# Altium PCB Relay Module PCB.PcbDoc
Units mm, origin at the board's own origin, x right, y up, seen from the top; angles counter-clockwise.
Board outline 140 x 70 mm, 2 copper layers (Top Layer, Bottom Layer); 36 components, 25 nets, 119 pads, 0 vias.
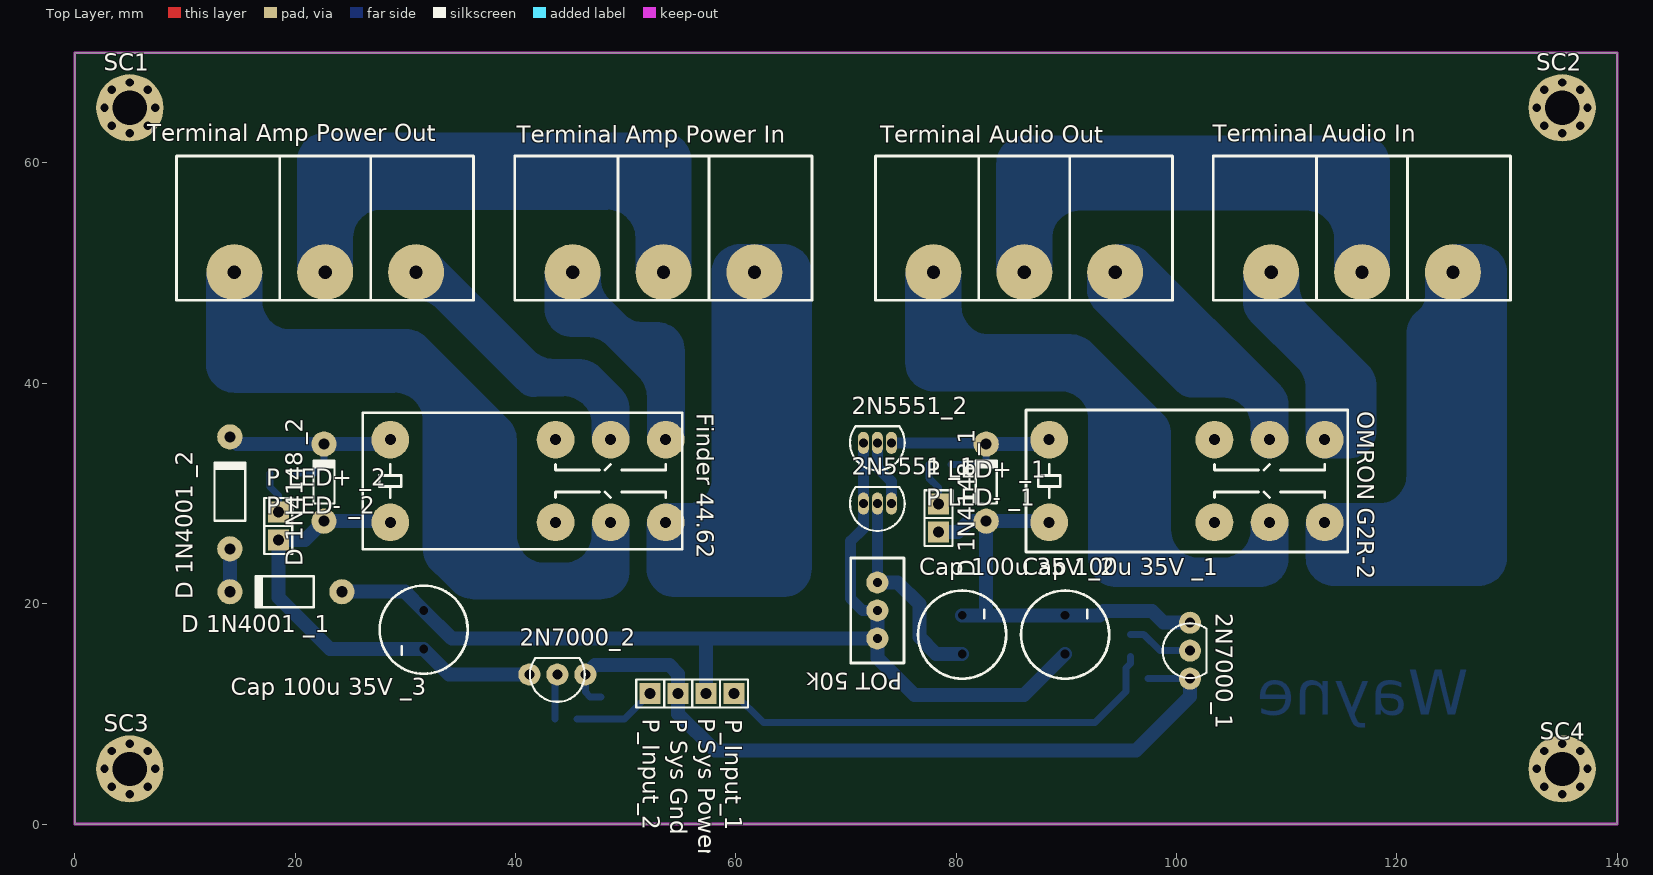
[diagram p0: Top Layer view]
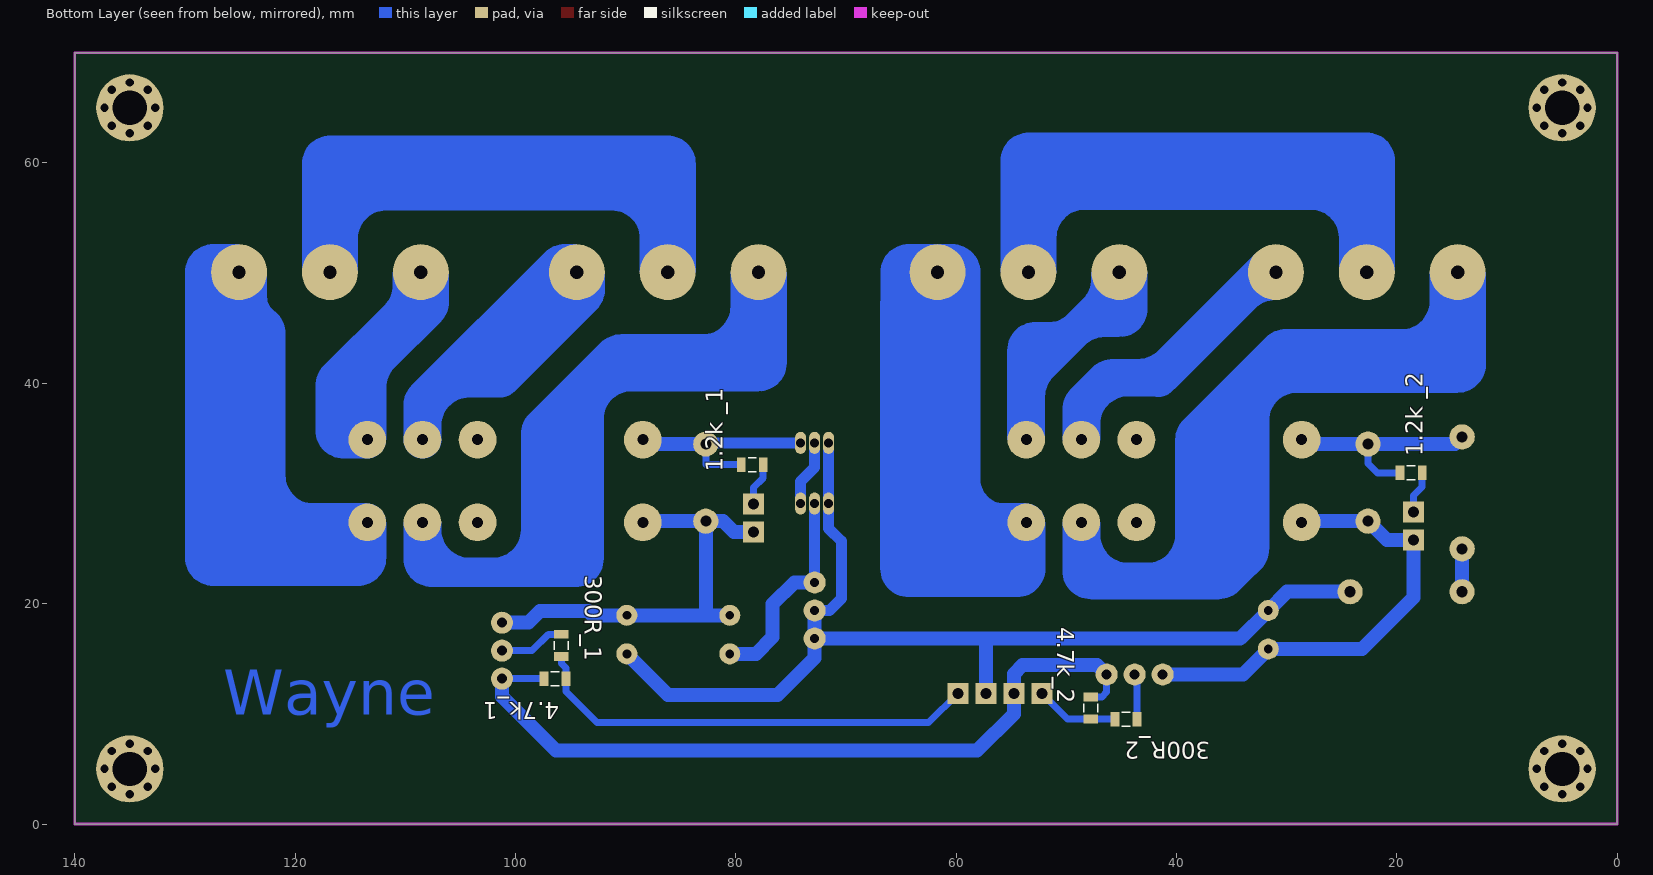
[diagram p1: Bottom Layer view, seen from below]

## Layer stack, top to bottom
Top Layer: signal copper 0.0356
Dielectric: dielectric 0.32, FR-4, Dk 4.8
Bottom Layer: signal copper 0.0356

## Board outline
0,0 0,70 140,70 140,0

## Design rules (kind name [scope] priority, off if disabled: settings)
Clearance polygon [InPolygon] p1: gap=2.54
Clearance [All] p2: gap=0.254
ComponentClearance [All] p1: gap=0 collisioncheckmode=3 verticalgap=0 showdistances=FALSE
HoleSize [All] p1: absolutevalues=TRUE maxlimit=5 minlimit=0.305 maxpercent=80.000 minpercent=20.000
PolygonConnect [All] p1: connectstyle=Relief reliefconductorwidth=0.254 reliefentries=4 polygonreliefangle="90 Angle" airgapwidth=0.254
RoutingVias [All] p1: holewidth=0.305 width=1.27 viastyle="Through Hole" minholewidth=0.305 minwidth=1.27 maxholewidth=2 maxwidth=1.27
ShortCircuit [All] p1: allowed=TRUE
SilkToSilkClearance [All] p1: silktosilkclearance=0
SilkToSolderMaskClearance [IsPad] p1: minsilkscreentomaskgap=0 clearancetoexposedcopper=TRUE
SolderMaskExpansion [All] p1: expansion=0.102
Width [All] p1: maxlimit=5.08 minlimit=0.635 preferedwidth=1.27
23 further rules are at their usual default settings.

## Components (designator, comment, footprint, x,y, rotation, side; value= is the part's Value field where it differs from the comment)
"1.2k _1" "Resistor SMD 0805" RES_0805 78.511,32.611 r0 bottom
"1.2k _2" "Resistor SMD 0805" RES_0805 18.708,31.875 r0 bottom
"2N5551 _1" "2N5551" 2N5551 72.847,29.081 r90 top
2N5551_2 "2N5551" 2N5551 72.847,34.593 r90 top
2N7000_1 "2N7000" 2N7000 101.224,15.732 r0 top
2N7000_2 "2N7000" 2N7000 43.802,13.57 r90 top
4.7k_1 "Resistor SMD 0805" RES_0805 96.423,13.192 r180 bottom
4.7k_2 "Resistor SMD 0805" RES_0805 47.782,10.525 r270 bottom
300R_1 "Resistor SMD 0805" RES_0805 95.839,16.215 r90 bottom
300R_2 "Resistor SMD 0805" RES_0805 44.582,9.509 r180 bottom
"Cap 100u 35V _1" "Cap" "RADIAL CAPACITOR 3.5MM PITCH" 89.891,15.441 r90 top
"Cap 100u 35V _2" "Cap" "RADIAL CAPACITOR 3.5MM PITCH" 80.543,15.441 r90 top
"Cap 100u 35V _3" "Cap" "RADIAL CAPACITOR 3.5MM PITCH" 31.675,19.381 r270 top
"D 1N4001 _1" "Diode 1N4001" DO-41 14.085,21.08 r0 top
"D 1N4001 _2" "Diode 1N4001" DO-41 14.076,35.138 r270 top
"D 1N4148 _1" "Diode 1N4148" DO-35 82.728,27.48 r90 top
"D 1N4148 _2" "Diode 1N4148" DO-35 22.619,27.481 r90 top
"Finder 44.62" "Finder 44.62" "FINDER 44.62" 28.639,27.379 r0 top
"OMRON G2R-2" "OMRON G2R-2" "OMRON G2R-2 - BROWN" 88.443,27.379 r0 top
"P LED+ _1" "Header 1 Pin" HDR1X1_180_2.54 78.384,29.03 r90 top
"P LED+ _2" "Header 1 Pin" HDR1X1_180_2.54 18.479,28.319 r90 top
"P LED- _1" "Header 1 Pin" HDR1X1_180_2.54 78.384,26.49 r90 top
"P LED- _2" "Header 1 Pin" HDR1X1_180_2.54 18.479,25.779 r90 top
"P Sys Gnd" "Header 1 Pin" HDR1X1_180_2.54 54.767,11.846 r180 top
"P Sys Power" "Header 1 Pin" HDR1X1_180_2.54 57.307,11.846 r180 top
P_Input_1 "Header 1 Pin" HDR1X1_180_2.54 59.847,11.846 r180 top
P_Input_2 "Header 1 Pin" HDR1X1_180_2.54 52.227,11.846 r180 top
"POT 50k" "BOURNS 3296" "POTENTIOMETER 25 TURN" 72.847,19.378 r180 top
SC1 "M3" SCRREW_M3 5,65 r0 top
SC2 "M3" SCRREW_M3 135,65 r0 top
SC3 "M3" SCRREW_M3 5,5 r0 top
SC4 "M3" SCRREW_M3 135,5 r0 top
"Terminal Amp Power In" "3P Terminal Block" "3P TERMINAL BLOCK" 53.442,50.087 r180 top
"Terminal Amp Power Out" "3P Terminal Block" "3P TERMINAL BLOCK" 22.733,50.087 r180 top
"Terminal Audio In" "3P Terminal Block" "3P TERMINAL BLOCK" 116.84,50.087 r180 top
"Terminal Audio Out" "3P Terminal Block" "3P TERMINAL BLOCK" 86.182,50.087 r180 top

## Footprints (in the part's own frame and the unit in brackets; to place one, negate y for a bottom-side part, rotate by r counter-clockwise, add the part's x,y. Pads: shape width x height; smd on the part's side, far side on the other; paste and mask are expansions set on the pad)
2N5551 [mm] "TO, Flat Index; 3 In-Line, Axial Leads; Body Dia. 4.5mm; Leads 0.51 x 0.48 mm (max)"
  oval 2x1 hole 0.8: 1(0,-1.27) 2(0,0) 3(0,1.27)
  silkscreen extent -2.48,-2.48 1.5,2.48, body extent -2.41,-2.4 1.59,2.4, height 6.55
2N7000 [mm] "2N7000 TO-92"
  round 2 hole 0.9: 1(0,-2.54) 2(0,0) 3(0,2.54)
  silkscreen extent -2.48,-2.48 1.5,2.48, body extent -2.66,-2.89 1.53,2.85, height 10.33
"3P TERMINAL BLOCK" [mm] "Howder 3P Terminal Block HD-816-3P"
  round 5.08 hole 1.2: 0(-8.25,0) 1(0,0) 2(8.25,0)
  silkscreen extent -13.46,-10.54 13.5,2.56, body extent -13.5,-10.5 13.5,2.51, height 13
DO-35 [mil] "Diode, Axial; Body 3.8 x 1.9 mm (LxDia. max), Lead Dia. 0.53 mm (max)"
  round 90 hole 39.37: 1(0,0) 2(275.59,0)
  silkscreen extent 63,-37 220,37, body extent -10,-39 285,39, height 79
DO-41 [mil] "Diode, Axial; Body 5.2 x 2.7 mm (LxDia. max), Lead Dia. 0.86 mm (max)"
  round 90 hole 39.37: 1(400,0) 2(0,0)
  silkscreen extent 87,-55 300,55, body extent -17,-54 417,54, height 107
"FINDER 44.62" [mm] "Finder 44.62 PCB Relay"
  round 3.429 hole 1: C1(20,7.5) C2(20,0) Coil+(0,7.5) Coil-(0,0) NC1(15,7.5) NC2(15,0) NO1(25,7.5) NO2(25,0)
  silkscreen extent -2.5,-2.45 26.5,9.95, body extent -2.5,-2.4 26.5,10, height 25.03
HDR1X1_180_2.54 [mm] "Connector; Header; 2 Position"
  rect 1.905x1.905 hole 1: 1(0,0)
  silkscreen extent -1.27,-1.27 1.27,1.27, body extent -1.27,-1.27 1.27,1.27, height 7.58
"OMRON G2R-2 - BROWN" [mm] "OMRON G2R-2 Power Relay DPDT"
  round 3.429 hole 1: C1(20,7.5) C2(20,0) Coil+(0,7.5) Coil-(0,0) NC1(15,7.5) NC2(15,0) NO1(25,7.5) NO2(25,0)
  silkscreen extent -2.1,-2.7 27.1,10.2, body extent -2.1,-2.61 26.86,10.11, height 25.27
"POTENTIOMETER 25 TURN" [mm] "Bourns Potentiometer 3296"
  round 2 hole 0.8: 1(0,-2.54) 2(0,0) 3(0,2.54)
  silkscreen extent -2.41,-4.78 2.41,4.78, body extent -2.41,-4.77 2.42,4.77, height 11.55
"RADIAL CAPACITOR 3.5MM PITCH" [mm] "Radial Capacitor 3.5mm Pitch 8*11"
  round 0 / inner round 0 / far side round 1.905 hole 0.8: 0(0,0) 1(3.5,0)
  silkscreen extent -2.25,-4 5.75,4, body extent -2.25,-3.99 5.75,4.01, height 11.54
RES_0805 [mm] "Chip Resistor, Body 2.0x1.2mm, 0805, IPC Medium Density"
  round 0.254 on Mech14: 0(0,0)
  rect 0.8x1.3 smd: 1(-1,0) 2(1,0)
  Top Layer pour cut-out: -0.6,0.75 0.6,0.75 0.6,-0.75 -0.6,-0.75
  silkscreen extent -0.38,-0.64 0.38,0.64, body extent -1.1,-0.67 1.1,0.68, height 0.69
SCRREW_M3 [mil]
  round 50 hole 30: 0(-90.55,0) 0(-64.03,-64.03) 0(-64.03,64.03) 0(0,-90.55) 0(0,90.55) 0(64.03,-64.03) 0(64.03,64.03) 0(90.55,0)
  round 240.16 hole 122.05: 0(0,0)

## Part data
"2N5551 _1" 2N5551_2: "NPN 2N5551 General Purpose Amplifier"
2N7000_1 2N7000_2: "2N7000 TO-92"
"Cap 100u 35V _1" "Cap 100u 35V _2" "Cap 100u 35V _3": library part "Cap Radial 8*11 3.5mm Pitch", "Cap Radial 8*11 3.5mm Pitch"
"D 1N4001 _1" "D 1N4001 _2": "1 Amp General Purpose Rectifier"
"D 1N4148 _1" "D 1N4148 _2": "High Conductance Fast Diode"
"Finder 44.62": "Finder 44.62 PCB Relay"
"OMRON G2R-2": "OMRON G2R-2 Power Relay DPDT"
SC1 SC2 SC3 SC4: library part Screw_M3, "Screw"
"Terminal Amp Power In" "Terminal Amp Power Out" "Terminal Audio In" "Terminal Audio Out": "Howder 3P Terminal Block HD-816-3P"

## Nets (pads, with @x,y where several pads share a name; then routed paths per layer and width w, separated by ;. In a path a pad name is that pad's centre, name@x,y a point inside that pad or via, vN(x,y) a via of type N, cw(c..) or ccw(c..) an arc to the next point about the centre after c; other vN are vias at no path point)
AUDIO_GND: "Terminal Audio In.1" "Terminal Audio Out.1" | length 44.4
  Bottom Layer w3.429: 86.182,50.087 86.182,55.809 88.879,58.506 114.229,58.506 116.84,55.894 116.84,50.087
AUDIO_IN_L: "OMRON G2R-2.NO2" "Terminal Audio In.0" | length 34.4
  Bottom Layer w3.429: 113.443,27.379 125.09,27.379 125.09,50.087
AUDIO_IN_R: "OMRON G2R-2.NO1" "Terminal Audio In.2" | length 17.2
  Bottom Layer w3.429: 108.59,50.087 108.59,46.237 113.443,41.385 113.443,34.879
AUDIO_OUT_L: "OMRON G2R-2.C2" "Terminal Audio Out.2" | length 39.3
  Bottom Layer w3.429: 77.932,50.087 77.932,43.545 ccw(c80.472,43.545) 80.472,41.005 92.359,41.005 96.347,37.017 96.347,25.765
AUDIO_OUT_R: "OMRON G2R-2.C1" "Terminal Audio Out.0" | length 23.8
  Bottom Layer w3.429: 94.432,50.087 94.432,47.34 101.351,40.421 106.162,40.421 108.443,38.141 108.443,34.879
GND: 2N7000_1.1 2N7000_2.1 4.7k_1.1 4.7k_2.1 "P Sys Gnd.1" | length 71.3
  Bottom Layer w0.635: 2N7000_2.1 46.342,11.966 46.782,11.525 4.7k_2.1 ; 4.7k_1.1 2N7000_1.1
  Bottom Layer w1.27: 2N7000_2.1 47.199,14.427 53.964,14.427 54.767,13.624 54.767,11.846 54.767,9.992 58.104,6.655 96.312,6.655 101.224,11.567 2N7000_1.1
"Net1.2k _1_1": "1.2k _1.1" "P LED+ _1.1" | length 3.9
  Bottom Layer w0.635: 77.511,32.611 77.511,31.404 78.384,30.531 78.384,29.03
"Net1.2k _1_2": 2N5551_2.1 "1.2k _1.2" "D 1N4148 _1.2" "OMRON G2R-2.Coil+" | length 19.6
  Bottom Layer w0.635: 79.511,32.611 82.728,32.611 82.728,34.48
  Bottom Layer w1: 2N5551_2.1 82.615,34.593 82.728,34.48
  Bottom Layer w1.27: 82.728,34.48 88.044,34.48 88.443,34.879
"Net1.2k _2_1": "1.2k _2.1" "P LED+ _2.1" | length 3.9
  Bottom Layer w0.635: 17.708,31.875 17.708,30.578 18.479,29.806 18.479,28.319
"Net1.2k _2_2": "1.2k _2.2" "D 1N4001 _2.2" "D 1N4148 _2.2" "Finder 44.62.Coil+" | length 20
  Bottom Layer w0.635: 19.708,31.875 21.761,31.875 22.619,32.733 22.619,34.481
  Bottom Layer w1.27: 14.076,35.138 14.734,34.481 22.619,34.481 28.241,34.481 28.639,34.879
"Net2N5551 _1_1": 2N5551_2.2 "2N5551 _1.1" | length 6
  Bottom Layer w1: 2N5551_2.2 72.847,32.374 74.117,31.104 74.117,29.081
"Net2N5551 _1_2": "2N5551 _1.2" "Cap 100u 35V _2.0" "POT 50k.1" | length 19.3
  Bottom Layer w1: 72.847,21.918 72.847,29.081
  Bottom Layer w1.27: 72.847,21.918 74.693,21.918 76.662,19.949 76.662,16.951 78.172,15.441 80.543,15.441
Net2N7000_1_2: 2N7000_1.2 300R_1.2 | length 6
  Bottom Layer w0.635: 300R_1.2 97.023,17.215 98.506,15.732 2N7000_1.2
Net2N7000_1_3: 2N7000_1.3 "Cap 100u 35V _1.1" "Cap 100u 35V _2.1" "D 1N4148 _1.1" "OMRON G2R-2.Coil-" "P LED- _1.1" | length 42.5
  Bottom Layer w1.27: 78.384,26.49 80.186,26.49 81.176,27.48 82.728,27.48 ; 88.443,27.379 88.342,27.48 82.728,27.48 ; 2N7000_1.3 98.822,18.272 97.78,19.314 93.38,19.314 93.007,18.941 89.891,18.941 80.543,18.941 82.728,18.941 82.728,27.48
Net2N7000_2_2: 2N7000_2.2 300R_2.2 | length 4.2
  Bottom Layer w0.635: 300R_2.2 43.582,13.35 2N7000_2.2
Net2N7000_2_3: 2N7000_2.3 "Cap 100u 35V _3.1" "D 1N4148 _2.1" "Finder 44.62.Coil-" "P LED- _2.1" | length 41.8
  Bottom Layer w1.27: 28.639,27.379 28.537,27.481 22.619,27.481 20.917,25.779 18.479,25.779 18.479,20.575 23.173,15.881 31.675,15.881 33.986,13.57 2N7000_2.3
Net4.7k_1_2: 4.7k_1.2 300R_1.1 P_Input_1.1 | length 41.2
  Bottom Layer w0.635: P_Input_1.1 62.498,9.195 92.608,9.195 95.423,12.01 4.7k_1.2 95.423,14.148 95.839,14.564 300R_1.1
Net4.7k_2_2: 4.7k_2.2 300R_2.1 P_Input_2.1 | length 7.6
  Bottom Layer w0.635: 300R_2.1 45.598,9.525 4.7k_2.2 49.906,9.525 P_Input_2.1
"NetD 1N4001 _1_2": "D 1N4001 _1.2" "D 1N4001 _2.1" | length 3.9
  Bottom Layer w1.27: 14.076,24.978 14.085,24.969 14.085,21.08
POWER_GND: "Terminal Amp Power In.1" "Terminal Amp Power Out.1" | length 45
  Bottom Layer w3.429: 22.733,50.087 22.733,56.444 25.024,58.734 50.602,58.734 53.442,55.894 53.442,50.087
POWER_IN_24V: "Finder 44.62.NO1" "Terminal Amp Power In.2"
POWER_IN_-24V: "Finder 44.62.NO2" "Terminal Amp Power In.0" | length 29.1
  Bottom Layer w3.429: 53.639,27.379 58.845,27.379 61.692,30.226 61.692,50.087
POWER_OUT_24V: "Finder 44.62.C1" "Terminal Amp Power Out.0" | length 14.6
  Bottom Layer w3.429: 30.983,50.087 32.021,50.087 41.635,40.472
POWER_OUT_-24V: "Finder 44.62.C2" "Terminal Amp Power Out.2"
"SYSTEM POWER(13.XV)": 2N5551_2.3 "2N5551 _1.3" "Cap 100u 35V _1.0" "Cap 100u 35V _3.0" "D 1N4001 _1.1" "P Sys Power.1" "POT 50k.2" "POT 50k.3" | length 97.1
  Bottom Layer w1: 2N5551_2.3 71.577,29.081 71.577,26.827 70.414,25.664 70.414,20.457 71.492,19.378 72.847,19.378
  Bottom Layer w1.27: 24.245,21.08 29.976,21.08 31.675,19.381 34.218,16.838 57.307,16.838 ; 57.307,11.846 57.307,16.838 ; 72.847,19.378 72.847,16.838 ; 89.891,15.441 86.159,11.709 76.214,11.709 72.847,15.077 72.847,16.838 ; 57.307,16.838 72.847,16.838
pads on no net: 4.7k_1.0 4.7k_2.0 300R_1.0 300R_2.0 "1.2k _1.0" "1.2k _2.0" "Finder 44.62.NC1" "Finder 44.62.NC2" "OMRON G2R-2.NC1" "OMRON G2R-2.NC2" SC1.0 SC2.0 SC3.0 SC4.0

## Keep-outs
Keep-Out Layer:
  the board outline again, w0.254

## Other copper
Bottom Layer:
  region net POWER_OUT_-24V: 46.928,25.664 46.928,27.391 50.348,27.391 50.348,25.664
  region net POWER_OUT_-24V: 31.628,35.112 ccw(c31.687,35.053) 31.603,35.053 31.603,24.938 31.616,24.938 31.616,24.933 ccw(c34.156,24.933) 32.36,23.137 33.342,22.154 33.35,22.154 33.351,22.154 33.342,22.154 33.35,22.154 34.341,21.163 ccw(c36.137,22.96) 36.137,20.42 47.808,20.42 ccw(c47.808,22.96) 50.348,22.96 50.348,27.391 46.928,27.391 46.928,26.236 cw(c44.388,26.236) 44.388,23.696 42.651,23.696 cw(c42.651,26.236) 40.111,26.236 38.638,34.249
  region net POWER_OUT_-24V: 11.943,50.098 11.943,41.691 ccw(c14.483,41.691) 14.483,39.151 23.5,39.151
  region net POWER_OUT_-24V: 31.623,35.117 31.628,35.798 31.628,36.128 31.603,36.611 ccw(c29.063,36.611) 29.063,39.151 14.483,39.151 cw(c14.483,41.691) 11.943,41.691 11.943,50.098 16.997,50.098 cw(c16.997,50.073) 17.023,50.073 17.023,47.431 ccw(c19.563,47.431) 19.563,44.891 28.518,44.891 cw(c28.518,42.351) 30.314,44.147 35.946,38.516 37.343,33.563
  region net POWER_OUT_-24V: 35.946,38.516 39.368,35.094 cw(c37.571,33.298) 40.111,33.298 40.111,26.236 31.616,24.938 31.59,36.86
  region net POWER_IN_-24V: 59.161,50.048 59.161,31.633 cw(c56.621,31.633) 56.621,29.093 53.65,29.093 53.65,25.664 61.676,25.664 ccw(c61.676,28.204) 64.216,28.204 64.216,50.048
  region net POWER_IN_-24V: 59.161,50.048 59.161,47.086 cw(c56.621,47.086) 58.418,45.29 58.018,44.891 ccw(c58.509,44.401) 57.815,44.401 57.815,31.277 cw(c55.631,31.277) 55.631,29.093 53.65,29.093 53.65,25.664 64.318,25.664 ccw(c64.318,28.204) 66.858,28.204 66.858,47.446 ccw(c64.318,47.446) 66.114,49.242 63.479,51.876
  region net POWER_IN_-24V: 57.815,43.494 57.815,50.073 cw(c60.355,50.073) 60.355,52.613 61.727,52.613 61.727,44.18 ccw(c62.667,44.18) 62.667,43.24
  region net POWER_GND: 20.198,50.073 20.198,60.208 cw(c22.738,60.208) 22.738,62.748 53.421,62.748 cw(c53.421,60.208) 55.961,60.208 55.961,50.073 50.957,50.073 cw(c50.957,50.048) 50.983,50.048 50.932,50.048 cw(c50.932,50.073) 50.906,50.073 50.906,53.209 ccw(c48.366,53.209) 48.366,55.749 27.792,55.749 ccw(c27.792,53.209) 25.252,53.209 25.252,50.073
  region net POWER_IN_-24V: 61.727,52.613 64.318,52.613 cw(c64.318,50.073) 66.858,50.073 66.858,28.204
  region net AUDIO_GND: 83.647,50.048 83.647,59.928 cw(c86.187,59.928) 86.187,62.468 116.819,62.468 cw(c116.819,59.928) 119.359,59.928 119.359,50.073 114.305,50.073 114.305,53.146 ccw(c111.765,53.146) 111.765,55.686 91.242,55.686 ccw(c91.242,53.146) 88.702,53.146 88.702,50.073
  region net AUDIO_OUT_L: 75.392,50.073 75.392,41.818 ccw(c77.932,41.818) 77.932,39.278 90.048,39.278 cw(c90.048,36.738) 92.588,36.738 92.588,24.063 ccw(c95.128,24.063) 95.128,21.523 107.599,21.523 ccw(c107.599,24.063) 110.139,24.063 110.139,27.365 106.736,27.365 106.736,26.705 cw(c104.196,26.705) 104.196,24.165 102.182,24.158 cw(c102.182,24.183) 102.156,24.183 101.325,24.19 cw(c101.325,26.73) 98.785,26.73 98.785,36.092 ccw(c96.245,36.092) 98.042,37.888 92.24,43.69 ccw(c90.444,41.894) 90.444,44.434 83.012,44.434 cw(c83.012,46.974) 80.472,46.974 80.472,50.073
  region net AUDIO_OUT_R: 110.139,34.884 110.139,36.905 ccw(c107.599,36.905) 109.395,38.701 96.245,51.851 94.707,51.851 ccw(c94.707,49.311) 92.911,51.107 91.902,50.098 91.902,48.483 ccw(c94.442,48.483) 92.646,46.687 99.87,39.463 ccw(c101.666,41.259) 101.666,38.719 104.196,38.719 cw(c104.196,36.179) 106.736,36.179 106.736,34.858
  region net AUDIO_OUT_R: 110.139,34.884 110.139,38.023 ccw(c107.599,38.023) 109.395,39.819 97.345,51.869 ccw(c95.549,50.073) 95.549,52.613 94.417,52.613
  region net AUDIO_IN_R: 111.13,50.073 111.13,48.89 ccw(c113.67,48.89) 111.874,47.094 117.396,41.571 cw(c115.6,39.775) 118.14,39.775 118.14,35.722 cw(c115.6,35.722) 115.6,33.182 113.441,33.182 111.638,43.799 108.768,46.492 108.056,50.022
  region net AUDIO_IN_R: 111.739,34.858 111.739,39.597 ccw(c109.199,39.597) 110.996,41.394 106.794,45.595 cw(c108.59,47.391) 106.05,47.391 106.05,50.098 ccw(c106.356,50.405) 106.356,49.971 110.038,49.971 113.949,39.684
  region net AUDIO_IN_L: 122.56,50.073 122.56,47.849 cw(c120.999,47.849) 122.103,46.746 122.103,46.771 121.627,46.296 ccw(c123.423,44.5) 120.883,44.5 120.883,31.633 cw(c118.343,31.633) 118.343,29.093 113.467,29.093 cw(c111.739,29.093) 111.739,27.365 111.739,24.165 ccw(c114.279,24.165) 114.279,21.625 127.437,21.625 ccw(c127.437,24.165) 129.977,24.165 129.977,50.073 ccw(c127.437,50.073) 127.437,52.613 125.1,52.613
  region net AUDIO_OUT_L: 83.99,39.284 89.464,39.284 cw(c89.464,36.744) 92.004,36.744 92.004,24.057 ccw(c94.544,24.057) 94.544,21.517 101.364,21.517 96.855,25.816 96.144,36.814 89.667,41.285
  region net AUDIO_OUT_L: 92.248,43.699 98.753,37.194 cw(c96.957,35.398) 99.497,35.398 99.497,26.7 ccw(c102.037,26.7) 102.037,24.16 103.189,24.16 97.795,23.073
  region net POWER_IN_-24V: 51.922,27.365 51.922,23.149 ccw(c54.462,23.149) 54.462,20.609 64.33,20.609 ccw(c64.33,23.149) 66.87,23.149 66.87,47.446 60.376,26.619
  region net POWER_OUT_24V: 46.944,34.833 46.944,36.281 ccw(c44.404,36.281) 44.404,38.821 41.9,38.821 cw(c41.9,41.361) 40.104,39.565 32.854,46.814 ccw(c31.058,45.018) 31.058,47.558 30.967,47.558 28.967,49.559 cw(c29.227,49.819) 28.859,49.819 29.36,50.32 cw(c31.156,48.524) 31.156,51.064 31.272,51.064 42.55,40.269 47.884,38.846 49.632,33.934
  region net POWER_OUT_-24V: 24.041,44.898 30.112,44.898 cw(c30.112,42.358) 31.908,44.154 39.355,36.707 cw(c37.559,34.911) 40.099,34.911 40.099,26.236 33.05,38.389
  region net POWER_OUT_24V: 32.872,51.749 41.679,42.943 ccw(c43.475,44.739) 43.475,42.199 44.48,42.199 44.48,42.174 44.506,42.174 44.506,42.199 45.79,42.199 cw(c45.79,39.659) 47.586,41.455 49.604,39.438 cw(c47.808,37.642) 50.348,37.642 50.348,34.858 cw(c50.286,34.92) 50.286,34.833 46.944,34.833 ccw(c46.086,35.691) 47.3,35.691 47.3,38.313 45.885,39.728 ccw(c44.089,37.932) 44.089,40.472 42.956,40.472 ccw(c41.239,38.755) 41.239,41.183 40.213,41.183
  region net POWER_OUT_24V: 42.22,41.412 42.22,40.955 ccw(c43.694,40.955) 42.651,39.913 43.133,39.913 cw(c43.133,38.439) 44.175,39.481 44.423,39.481 cw(c44.423,39.221) 44.607,39.405 ccw(c44.853,39.65) 44.853,39.303 44.912,39.303 ccw(c45.403,39.794) 45.403,39.1 45.674,39.1 45.813,38.961 ccw(c46.03,39.178) 46.03,38.872 46.122,38.779 ccw(c46.512,39.169) 46.512,38.618 cw(c47.432,38.618) 46.782,39.268 47.02,39.507 47.02,39.761 46.986,39.795 cw(c47.333,40.142) 46.842,40.142 46.539,40.445 cw(c46.973,40.878) 46.36,40.878 cw(c46.36,41.307) 46.056,41.004 45.928,41.132 ccw(c45.683,40.887) 45.683,41.234 45.572,41.234
  region net POWER_IN_24V: 42.651,50.073 42.651,47.533 ccw(c45.191,47.533) 45.191,44.993 46.781,44.993 cw(c46.781,42.453) 48.577,44.249 51.204,41.622 cw(c49.408,39.826) 51.948,39.826 51.948,34.884 55.351,34.884 55.351,42.123 ccw(c52.811,42.123) 52.811,44.663 52.176,44.663 cw(c52.176,46.318) 51.006,45.148 48.475,47.678 cw(c50.271,49.474) 47.731,49.474 47.731,50.098
  region net POWER_IN_24V: 42.651,50.073 42.651,46.746 ccw(c45.191,46.746) 45.191,44.206 46.527,44.206 cw(c46.527,41.666) 48.323,43.462 51.204,40.581 cw(c49.408,38.785) 51.948,38.785 51.948,34.884 54.081,35.138 53.726,40.599 51.719,43.113 49.027,45.603 46.334,50.098
  region net POWER_IN_24V: 47.731,50.098 47.731,49.449 ccw(c50.271,49.449) 48.475,47.653 49.941,46.187 ccw(c51.474,47.72) 51.474,45.552 52.811,45.552 cw(c52.811,43.012) 55.351,43.012 55.351,34.884 48.62,45.425 45.166,49.311
  text "Wayne" at 126.517,8.56 h7

## Silkscreen, mask and mechanical layers (free items; w line width, h text height)
Mechanical 20:
  rectangle: 0,65 5,70
  rectangle: 0,0 5,5
  rectangle: 135,0 140,5
  rectangle: 135,65 140,70
  lines w0.254: 5,65 5,74 ; 5,73.746 5,74.254 ; 6.524,73.492 5,74 ; 6.524,74.508 5,74 ; 64.261,74 5,74 ; 75.739,74 135,74 ; 133.476,73.492 135,74 ; 133.476,74.508 135,74 ; 135,5 142.254,5 141.746,5 ; 135,73.746 135,74.254 ; 141.492,6.524 142,5 ; 141.492,63.476 142,65 ; 141.746,65 142.254,65 135,65 135,74 ; 142,29.896 142,5 ; 142,40.104 142,65 ; 142.508,6.524 142,5 ; 142.508,63.476 142,65
  text "130 (mm)" at 64.515,73.086 h1.52
  text "60 (mm)" at 142.914,30.15 h1.52 r90